# Allegro board 8_1.brd
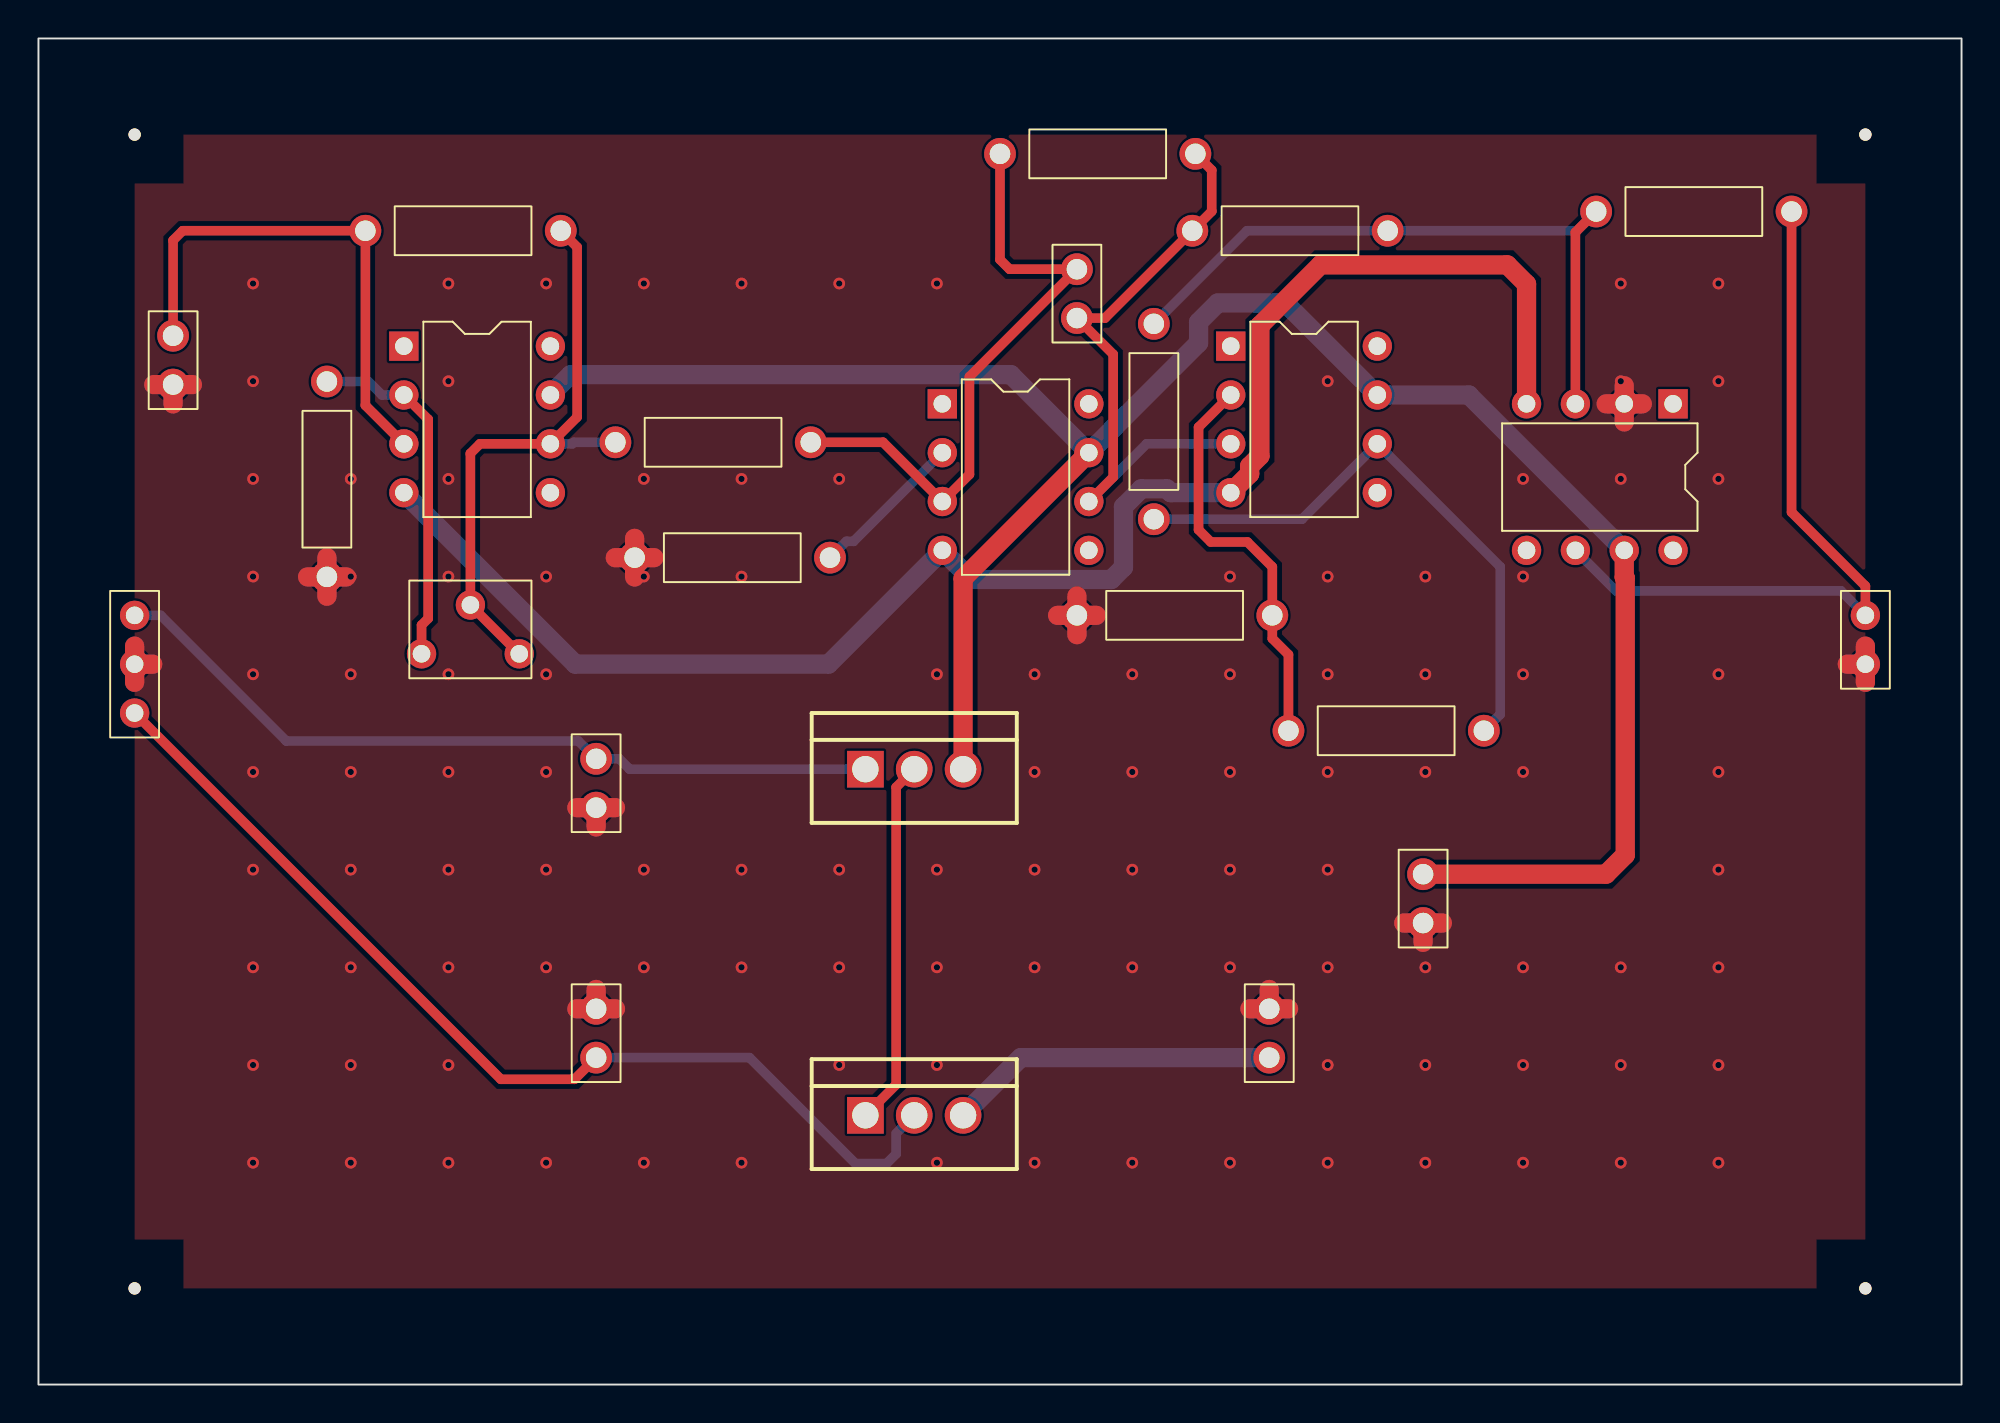
[diagram p0: board, top side]
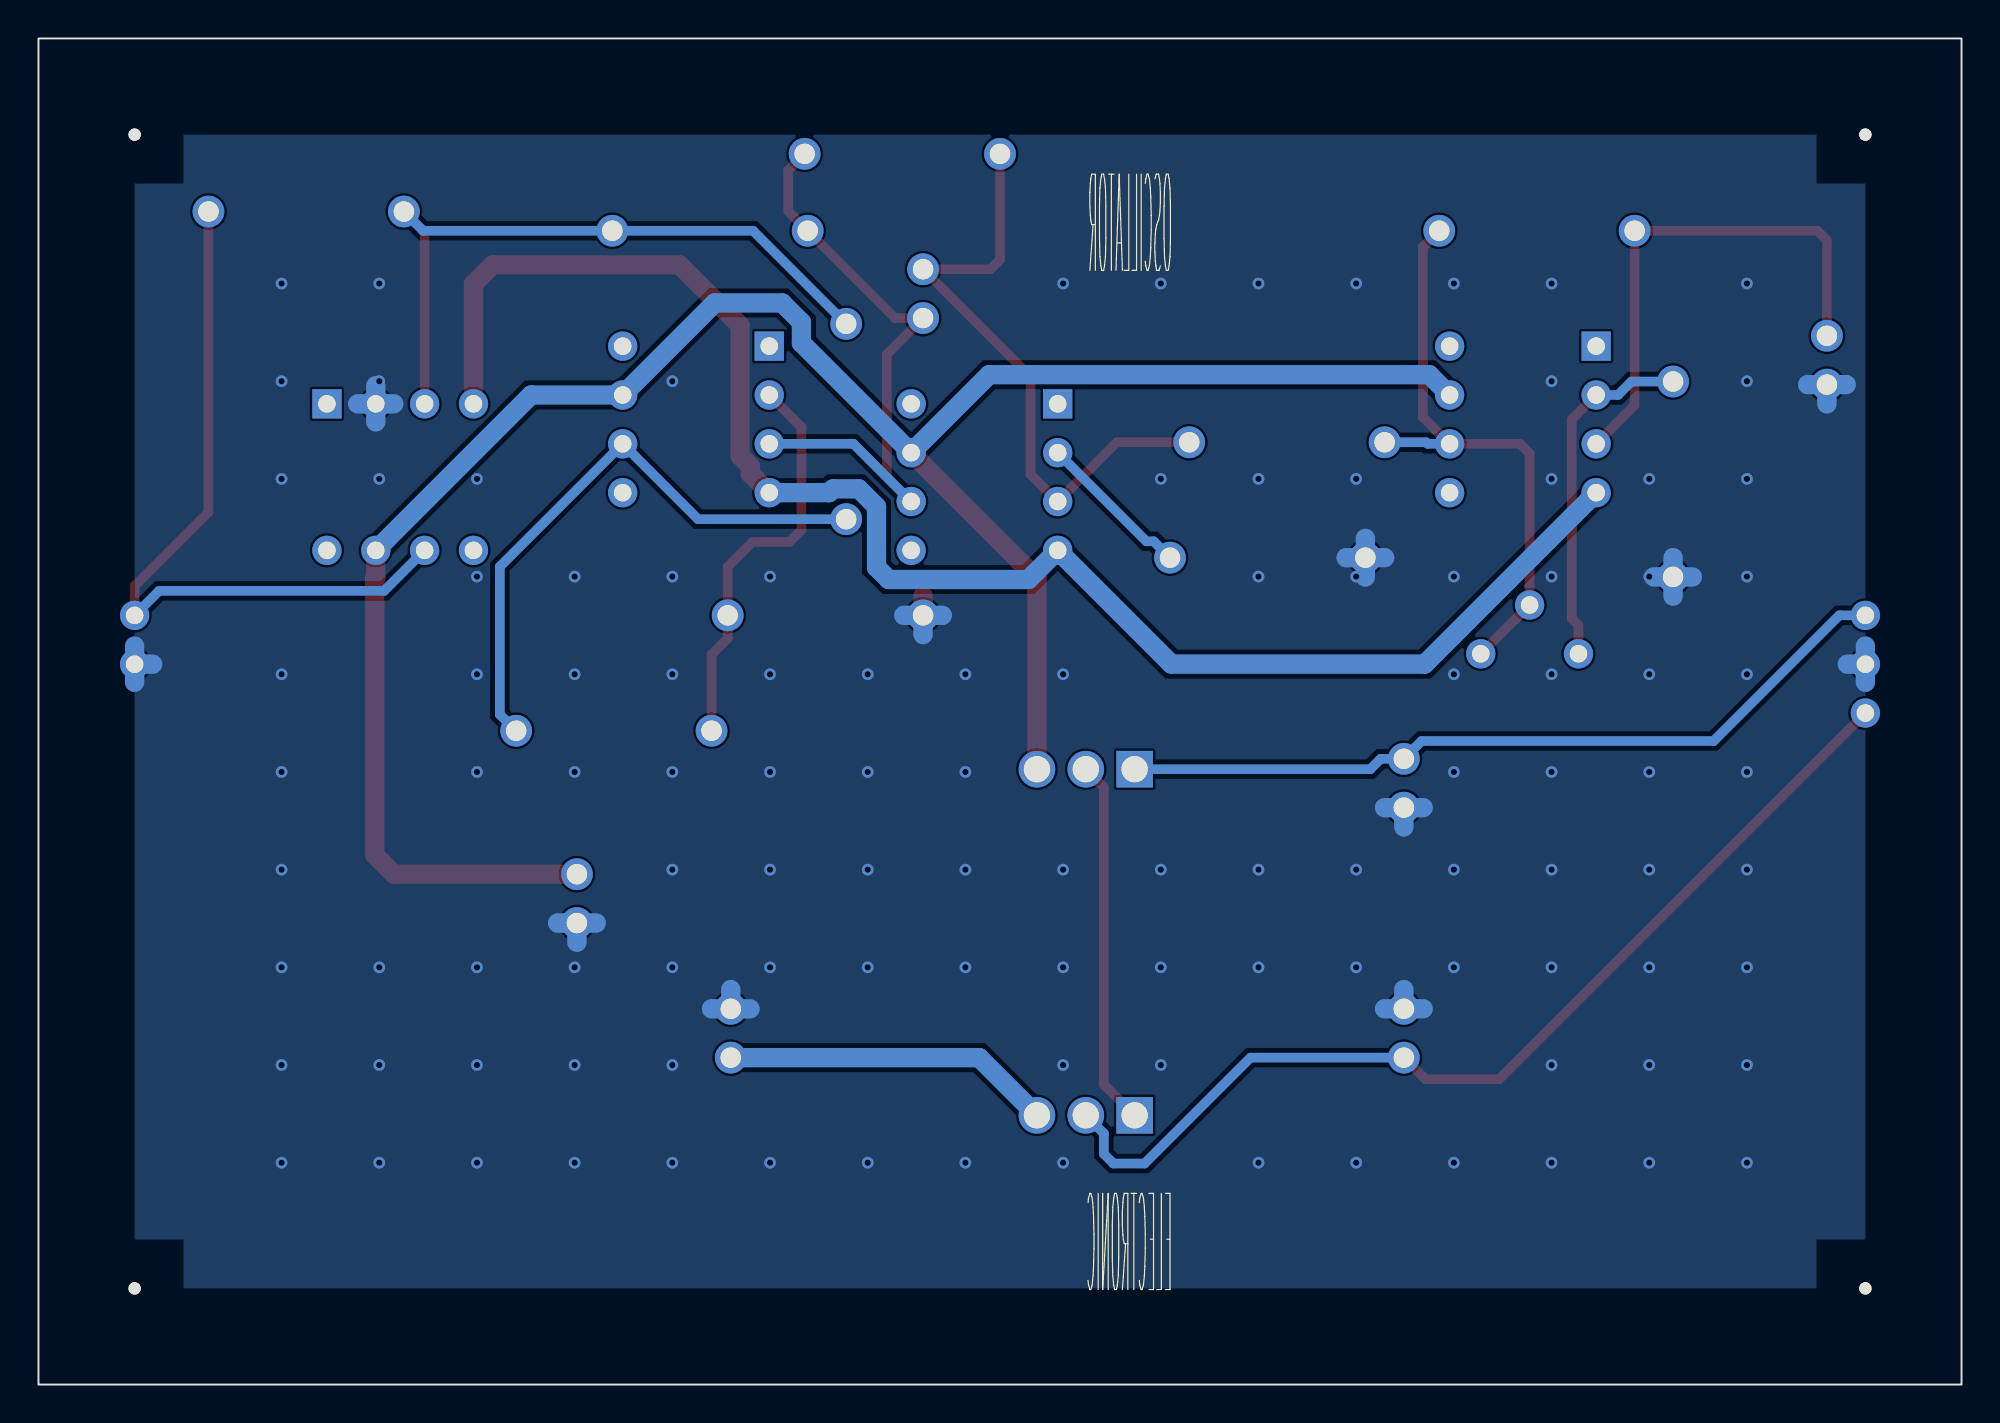
[diagram p1: board, bottom side, seen from below]

Outline 100 x 70 mm; copper layers: TOP, BOTTOM. Coordinates in mm from the lower left corner of the outline.
Outline path: rectangle 0,0 100,70

## Design rules (mm)
constraint set DEFAULT: min track width 0.5

## Placement (name value [footprint] x y rotation side)
C1  0.001uF  [CAPCK05]  54 58 180 top
C2  270pF  [CAPCK05]  7 52 0 top
C3  0.1UF  [CAPCK05]  29 30 0 top
C4  0.1UF  [CAPCK05]  72 24 0 top
C5  0.1UF  [CAPCK05]  29 17 0 top
C6  0.1UF  [CAPCK05]  64 17 0 top
J1  CON2  [JUMPER2]  95 40 270 top
J2  CON3  [JUMPER3]  5 40 270 top
NOREF  -  [unnamed]  95 65 0 top
NOREF#2  -  [unnamed]  5 65 0 top
NOREF#3  -  [unnamed]  95 5 0 top
NOREF#4  -  [unnamed]  5 5 0 top
R1  10k  [RES400]  17 60 270 top
R2  100k  [RES400]  50 64 270 top
R3  10k  [RES400]  60 60 270 top
R4  10k  [RES400]  81 61 270 top
R5  62k  [RES400]  30 49 270 top
R6  10k  [RES400]  31 43 270 top
R7  10k  [RES400]  58 45 0 top
R8  10k  [RES400]  15 42 0 top
R9  10k  [RES400]  65 34 270 top
R10  10k  [RES400]  54 40 270 top
U1  LF351  [DIP8_3]  19 54 0 top
U2  LF351  [DIP8_3]  47 51 0 top
U3  LF351  [DIP8_3]  62 54 0 top
U4  LF351  [DIP8_3]  85 51 270 top
U5  LM7812/TO_0  [TO220AB]  43 32 0 top
U6  LM7812/TO_0  [TO220AB]  43 14 0 top
VR1  M1  [RESADJ]  25 38 270 top

## Library data of the parts
C1-C6 = C: Tolerance: ***; User Part Number: ***
J1 = CON2: User Part Number: ***
J2 = CON3_0: User Part Number: ***
R1-R10 = R: Tolerance: ***; User Part Number: ***
U1-U4 = LF351_1: Tolerance: ***; User Part Number: ***
U5 = LM7812/TO_5
U6 = LM7812/TO_4
VR1 = POT: Tolerance: ***; User Part Number: ***

## Footprints (pads in the part's own frame, mm; a bottom-side part is the same pattern mirrored in y, then rotated)
CAPCK05
  round 1.651 hole 1.067: 1(0,0) 2(0,2.54)
DIP8_3
  rect 1.524x1.524 hole 0.914: 1(0,0)
  round 1.524 hole 0.914: 2(0,-2.54) 3(0,-5.08) 4(0,-7.62) 5(7.62,-7.62) 6(7.62,-5.08) 7(7.62,-2.54) 8(7.62,0)
JUMPER2
  round 1.524 hole 0.914: 1(0,0) 2(2.54,0)
JUMPER3
  round 1.524 hole 0.914: 1(0,0) 2(2.54,0) 3(5.08,0)
RES400
  round 1.651 hole 1.067: 1(0,0) 2(0,10.16)
RESADJ
  round 1.524 hole 0.914: 1(0,0) 2(-2.54,-2.54) 3(0,-5.08)
TO220AB
  rect 1.905x1.905 hole 1.372: 1(0,0)
  round 1.905 hole 1.372: 2(2.54,0) 3(5.08,0)
unnamed
  round 0.635 hole 3.175 unplated: (0,0)

## Nets
+VCC: C4.2 U1.7 U2.7 U3.7 U4.7 U5.3(VOUT)
-12V: C6.1 U6.3(VOUT)
-VCC: U1.4(V-) U2.4(V-) U3.4(V-) U4.4(V-)
GND: C2.1 C3.1 C4.1 C5.2 C6.2 J1.2 J2.2 R6.1 R8.1 R10.1 U4.2
OUT: J1.1 R4.2 U4.6
SIG: C1.2 R2.2 R3.1 U2.6 U3.3
N00510: C2.2 R1.1 U1.3
N00530: R1.2 R5.1 U1.6 VR1.1 VR1.2(WIPER)
N00565: R8.2 U1.2 VR1.3
N01189: C1.1 R2.1 R5.2 U2.3
N01589: R6.2 U2.2
N01772: R7.1 R9.2 U3.6
N01811: R9.1 R10.2 U3.2
N02047: R3.2 R4.1 R7.2 U4.3
N02677: C3.2 J2.1 U5.1
N02868: C5.1 J2.3 U6.2
N03669: U5.2 U6.1

Pads without a net: U1 1 5 8; U2 1 5 8; U3 1 5 8; U4 1 5 8

## Via types
v1: diameter 0.61, hole 0.33, TOP to BOTTOM, 110 vias

## Routing (per net, layer and track width the routed paths; a pad name or vN(x,y) marks a point on that pad's centre or on a via; arc(x,y) is an arc through that point)
+VCC: length 113.1
  TOP w1: C4.2 81.51,26.54 82.51,27.54 82.51,41.94 82.46,41.99 U4.7 ; U5.3 48.08,41.92 U2.7
  BOTTOM w1: U1.7 27.68,52.52 50.56,52.52 U2.7 60.33,54.16 60.33,55.24 61.33,56.24 64.83,56.24 U3.7 74.38,51.46 U4.7
-12V: length 17.2
  BOTTOM w1: U6.3 51.08,17 C6.1
-VCC: length 84.8
  TOP w1: U3.4 62.98,47.36 62.98,47.76 63.52,48.29 63.52,55.07 66.67,58.23 76.38,58.23 77.38,57.23 U4.4
  BOTTOM w1: U3.4 58.88,46.38 58.68,46.58 57.35,46.58 56.42,45.65 56.42,42.5 55.79,41.86 48.52,41.86 U2.4 41.09,37.47 27.91,37.47 U1.4
GND: length 72
  TOP w1: 53,40 R10.1 ; R10.1 55,40 ; R10.1 54,41 ; R10.1 54,39 ; 14,42 R8.1 ; R8.1 16,42 ; R8.1 15,41 ; R8.1 15,43 ; C3.1 30,30 ; C3.1 29,29 ; C3.1 28,30 ; 95,36.52 J1.2 ; J1.2 95,38.4 ; J1.2 94.06,37.46 ; U4.2 83.4,51 ; U4.2 82.46,51.94 ; U4.2 81.52,51 ; U4.2 82.46,50.06 ; C6.2 65,19.54 ; C6.2 64,20.54 ; C6.2 63,19.54 ; J2.2 5,38.4 ; J2.2 5.94,37.46 ; J2.2 5,36.52 ; 7,51 C2.1 ; C2.1 6,52 ; C2.1 8,52 ; 28,19.54 C5.2 ; C5.2 29,20.54 ; C5.2 30,19.54 ; 31,42 R6.1 ; R6.1 32,43 ; R6.1 31,44 ; R6.1 30,43 ; 71,24 C4.1 ; C4.1 72,23 ; C4.1 73,24
  BOTTOM w1: 54,39 R10.1 ; R10.1 55,40 ; R10.1 53,40 ; 6,52 C2.1 ; C2.1 8,52 ; C2.1 7,51 ; 72,23 C4.1 ; C4.1 73,24 ; C4.1 71,24 ; J2.2 5.94,37.46 ; J2.2 5,38.4 ; J2.2 5,36.52 ; 28,19.54 C5.2 ; C5.2 29,20.54 ; C5.2 30,19.54 ; U4.2 83.4,51 ; U4.2 82.46,50.06 ; U4.2 81.52,51 ; U4.2 82.46,51.94 ; 63,19.54 C6.2 ; C6.2 64,20.54 ; C6.2 65,19.54 ; J1.2 95,38.4 ; J1.2 95,36.52 ; J1.2 94.06,37.46 ; R6.1 32,43 ; R6.1 31,42 ; R6.1 30,43 ; R6.1 31,44 ; R8.1 15,43 ; R8.1 15,41 ; R8.1 14,42 ; R8.1 16,42 ; C3.1 30,30 ; C3.1 29,29 ; C3.1 28,30
  vias: v1(11.16,57.26) v1(11.16,52.18) v1(11.16,47.1) v1(11.16,42.02) v1(11.16,36.94) v1(11.16,31.86) v1(11.16,26.78) v1(11.16,21.7) v1(11.16,16.62) v1(11.16,11.54) v1(16.24,47.1) v1(16.24,42.02) v1(16.24,36.94) v1(16.24,31.86) v1(16.24,26.78) v1(16.24,21.7) v1(16.24,16.62) v1(16.24,11.54) v1(21.32,57.26) v1(21.32,52.18) v1(21.32,47.1) v1(21.32,42.02) v1(21.32,36.94) v1(21.32,31.86) v1(21.32,26.78) v1(21.32,21.7) v1(21.32,16.62) v1(21.32,11.54) v1(26.4,57.26) v1(26.4,42.02) v1(26.4,36.94) v1(26.4,31.86) v1(26.4,26.78) v1(26.4,21.7) v1(26.4,11.54) v1(31.48,57.26) v1(31.48,47.1) v1(31.48,42.02) v1(31.48,26.78) v1(31.48,21.7) v1(31.48,11.54) v1(36.56,57.26) v1(36.56,47.1) v1(36.56,42.02) v1(36.56,26.78) v1(36.56,21.7) v1(36.56,11.54) v1(41.64,57.26) v1(41.64,47.1) v1(41.64,26.78) v1(41.64,21.7) v1(41.64,16.62) v1(46.72,57.26) v1(46.72,36.94) v1(46.72,26.78) v1(46.72,21.7) v1(46.72,16.62) v1(46.72,11.54) v1(51.8,36.94) v1(51.8,31.86) v1(51.8,26.78) v1(51.8,21.7) v1(51.8,11.54) v1(56.88,36.94) v1(56.88,31.86) v1(56.88,26.78) v1(56.88,21.7) v1(56.88,11.54) v1(61.96,42.02) v1(61.96,36.94) v1(61.96,31.86) v1(61.96,26.78) v1(61.96,21.7) v1(61.96,11.54) v1(67.04,52.18) v1(67.04,42.02) v1(67.04,36.94) v1(67.04,31.86) v1(67.04,26.78) v1(67.04,21.7) v1(67.04,16.62) v1(67.04,11.54) v1(72.12,42.02) v1(72.12,36.94) v1(72.12,31.86) v1(72.12,21.7) v1(72.12,16.62) v1(72.12,11.54) v1(77.2,47.1) v1(77.2,42.02) v1(77.2,36.94) v1(77.2,31.86) v1(77.2,21.7) v1(77.2,16.62) v1(77.2,11.54) v1(82.28,57.26) v1(82.28,52.18) v1(82.28,47.1) v1(82.28,21.7) v1(82.28,16.62) v1(82.28,11.54) v1(87.36,57.26) v1(87.36,52.18) v1(87.36,47.1) v1(87.36,36.94) v1(87.36,31.86) v1(87.36,26.78) v1(87.36,21.7) v1(87.36,16.62) v1(87.36,11.54)
OUT: length 39.1
  TOP w0.5: J1.1 95,41.52 91.16,45.37 R4.2
  BOTTOM w0.5: J1.1 93.72,41.27 82.03,41.27 U4.6
SIG: length 32.1
  TOP w0.5: U2.6 55.89,47.19 55.89,53.57 C1.2 55.46,55.46 R3.1 61.01,61.01 61.01,63.15 R2.2
  BOTTOM w0.5: U3.3 57.62,48.92 U2.6
N00510: length 27.1
  TOP w0.5: U1.3 17,50.92 R1.1 7.5,60 7,59.5 C2.2
N00530: length 31.3
  TOP w0.5: R1.2 28.01,59.15 28.01,50.31 U1.6 22.96,48.92 22.46,48.42 VR1.2 VR1.1
  BOTTOM w0.5: U1.6 27.76,48.92 27.84,49 R5.1
N00565: length 18.4
  TOP w0.5: VR1.3 19.92,39.49 20.27,39.84 20.27,50.19 U1.2
  BOTTOM w0.5: U1.2 17.86,51.46 17.16,52.16 R8.2
N01189: length 32.8
  TOP w0.5: R2.1 50,58.5 50.5,58 C1.1 48.41,52.41 48.41,47.33 U2.3 43.92,49 R5.2
N01589: length 8.1
  BOTTOM w0.5: R6.2 42.01,43.85 42.39,43.85 U2.2
N01772: length 31.2
  BOTTOM w0.5: R9.2 76.01,34.85 76.01,42.53 U3.6 65.7,45 R7.1
N01811: length 21.2
  TOP w0.5: U3.2 60.33,49.78 60.33,44.45 60.96,43.81 62.87,43.81 64.16,42.52 R10.2 64.16,38.8 65,37.96 R9.1
N02047: length 35.9
  TOP w0.5: U4.3 79.92,59.92 R4.1
  BOTTOM w0.5: R4.1 80,60 R3.2 62.84,60 R7.2
N02677: length 41.3
  BOTTOM w0.5: J2.1 6.36,40 12.89,33.47 28.07,33.47 C3.2 30.2,32.54 30.74,32 U5.1
N02868: length 52.8
  TOP w0.5: J2.3 24.05,15.88 27.88,15.88 C5.1
  BOTTOM w0.5: U6.2 44.6,13.06 44.6,11.99 44.1,11.49 42.48,11.49 36.98,17 C5.1
N03669: length 19.1
  TOP w0.5: U5.2 44.6,31.06 44.6,15.6 U6.1

## Copper pours and planes (outline as drawn; the poured copper is in the pictures)
GND on TOP, BOTTOM: 5,5 5,65 95,65 95,5

## Text on the board
Ref Des/Silkscreen Bottom: OSCILLATOR | ELECTRONIC
DEVICE_TYPE_TOP: FIGURE | FINISHED_SIZE | 0.914 | 0.9144 | 1.067 | 1.3716 | 3.175 | DRILL CHART: TOP to BOTTOM | ALL UNITS ARE IN MILLIMETERS | PLATED | NON-PLATED | QTY | 36 | 4 | 32 | 6
